# Altium PCB nixie-clock.pcbdoc
Units mil, origin at the board's own origin, x right, y up, seen from the top; angles counter-clockwise.
Board outline 3899.99 x 3080 mil, 2 copper layers (Top Layer, Bottom Layer); 35 components, 72 nets, 221 pads, 0 vias.
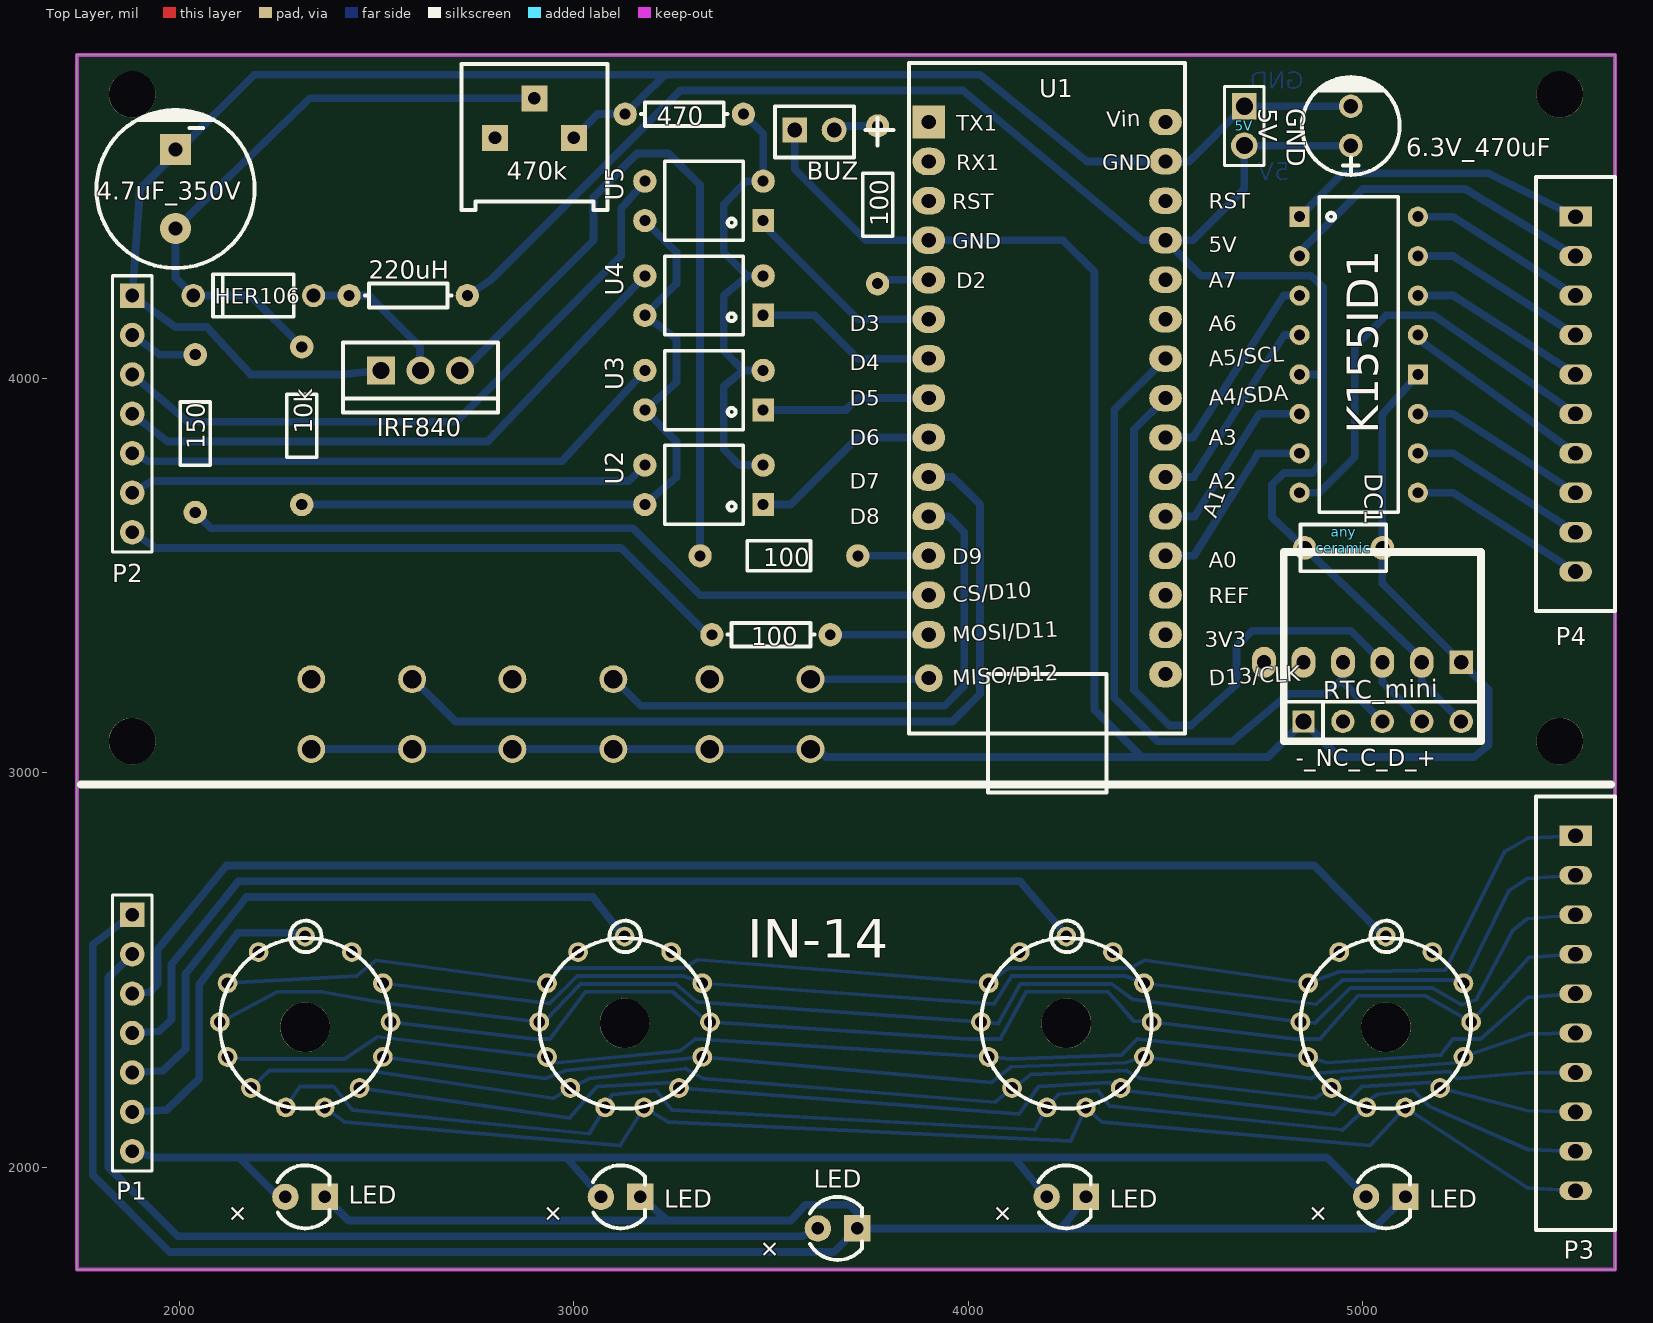
[diagram p0: Top Layer view]
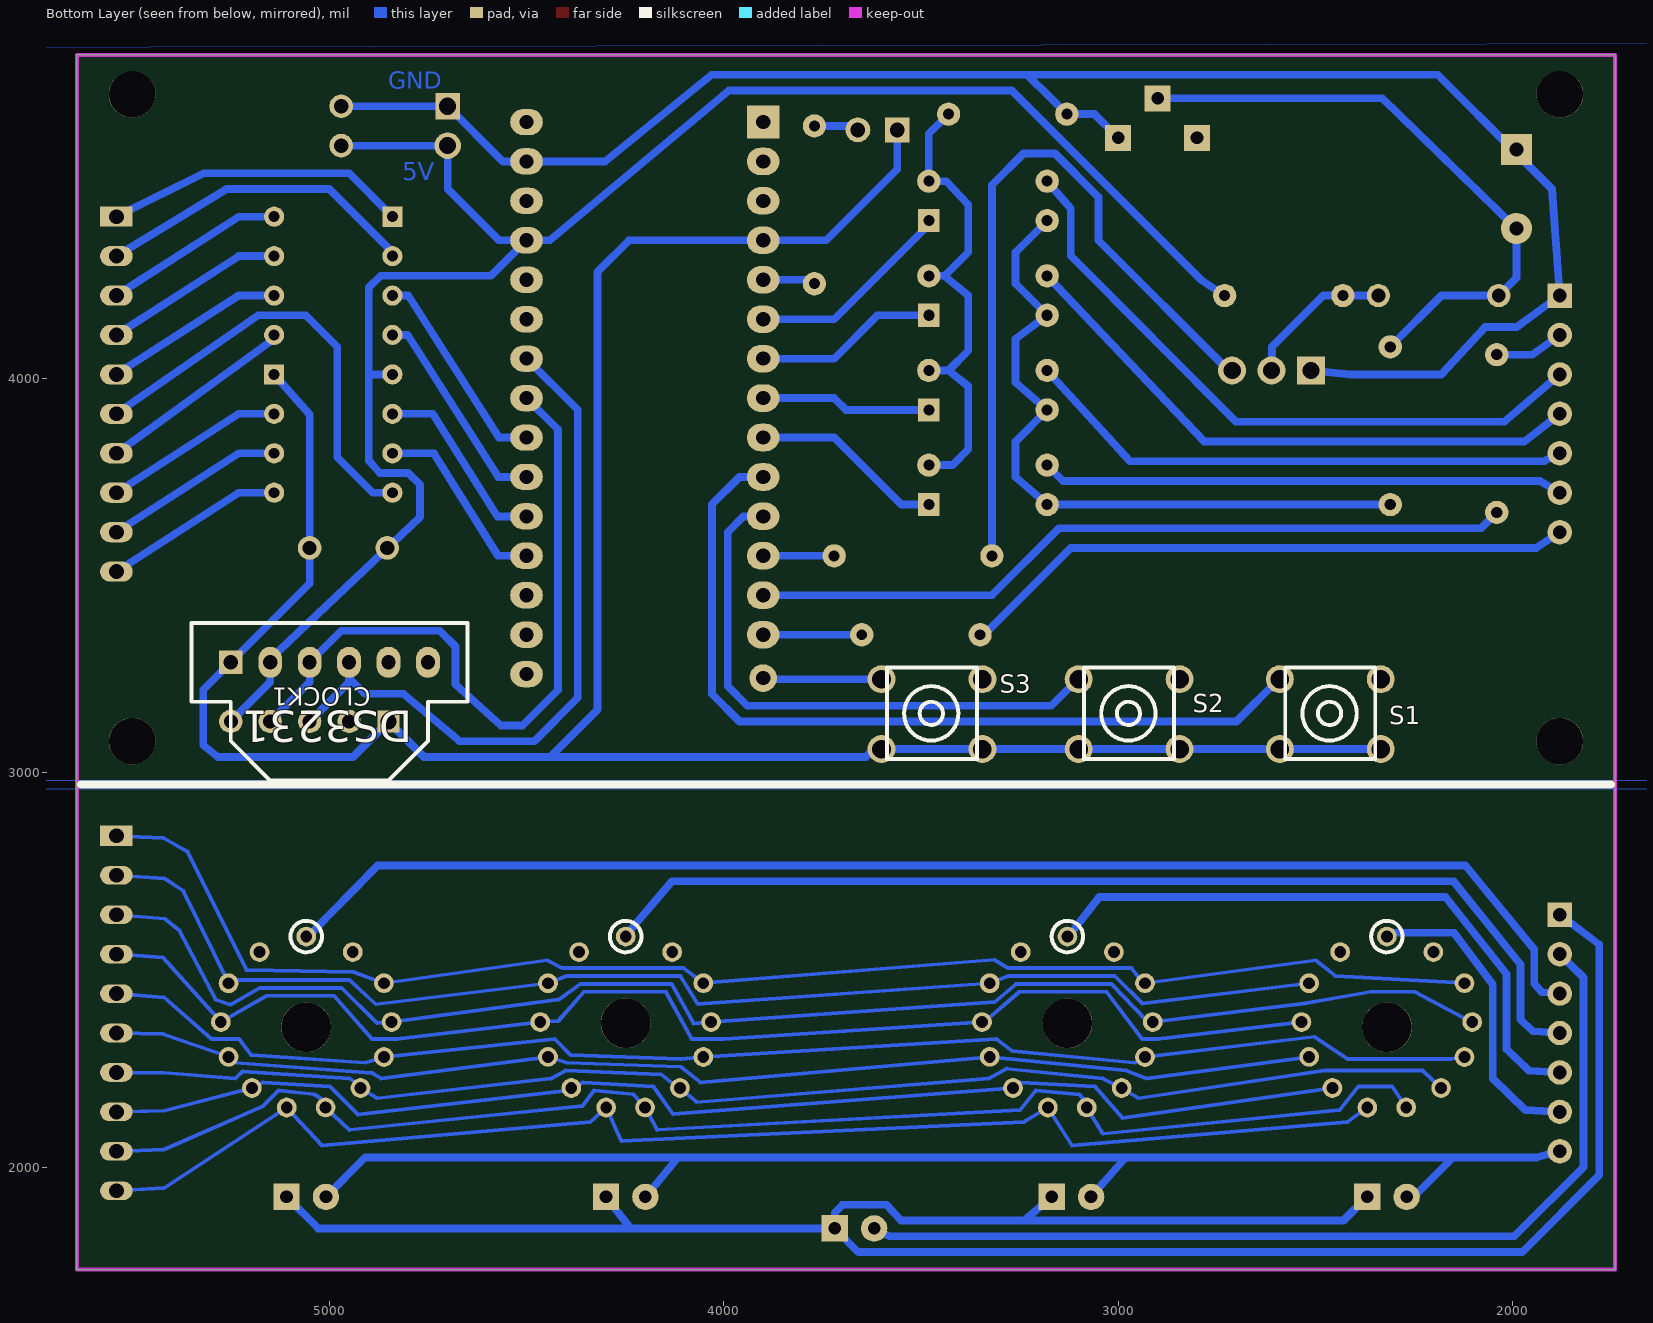
[diagram p1: Bottom Layer view, seen from below]

## Layer stack, top to bottom
Top Solder: solder mask 0.4, Solder Resist, Dk 3.5
Top Layer: signal copper 1.4
Dielectric1: dielectric 12.6, FR-4, Dk 4.8
Bottom Layer: signal copper 1.4
Bottom Solder: solder mask 0.4, Solder Resist, Dk 3.5

## Board outline
1740,1740 5639.99,1740 5639.99,4820 1740,4820

## Design rules (kind name [scope] priority, off if disabled: settings)
Clearance [All] p1: gap=10 ignorepadtopadclearanceinfootprint=FALSE
PolygonConnect [All] p1: connectstyle=Relief reliefconductorwidth=10 reliefentries=4 polygonreliefangle="90 Angle" airgapwidth=10
RoutingVias [All] p1: holewidth=28 width=50 viastyle="Through Hole" minholewidth=28 minwidth=50 maxholewidth=28 maxwidth=50
SolderMaskExpansion [All] p1: expansion=4 istentingtop=FALSE
Width [All] p1: maxlimit=10 minlimit=10 preferedwidth=10
30 further rules are at their usual default settings.

## Components (designator, comment, footprint, x,y, rotation, side; value= is the part's Value field where it differs from the comment)
4.7uF_350V "4.7u 350В" CP_10X13MM 1990,4479.99 r0 top
5V "HDR-2X1/2.54" HDR-2X1/2.54 4699.99,4639.99 r0 top
6.3V_470uF "CAP-D6.3XF2.5" CAP-D6.3XF2.5 4969.99,4639.99 r90 top
10k "10k" RC06 2310,3679.99 r90 top
100 "22k" RC06 3720,3549.99 r180 top
100 "330k" RC06 3770.01,4639.98 r270 top
100 "AXIAL-0.3" AXIAL-0.3 3500,3349.99 r0 top
150 "150" RC06 2040,3659.99 r90 top
220uH "AXIAL-0.3" AXIAL-0.3 2579.99,4209.99 r0 top
470 "AXIAL-0.3" AXIAL-0.3 3280,4669.99 r0 top
470k "_" 3386K 2900,4609.99 r0 top
"any / ceramic" "CAP-HV-5.0*3.0" CAP-HV-5.0*3.0 4949.99,3570 r180 top (schematic designator any)
BUZ "Buzzer" 2PIN_mod 3410,4629.99 r180 top
CLOCK1 "DS3231" DS3231 4949.99,3280 r180 bottom
DС1 "К155ИД1" DIP16_mod 4840,4409.99 r270 top
HER106 "HER106" DO-41 2339.99,4209.99 r180 top
IRF840 "IRF840" TO-220_mod 2619.99,4009.99 r180 top
LED "LED" LED3MM 3668.61,1844.58 r0 top
LED "LED" LED3MM 2318.62,1924.57 r0 top
LED "LED" LED3MM 3118.61,1924.57 r0 top
LED "LED" LED3MM 4248.6,1924.58 r0 top
LED "LED" LED3MM 5058.61,1924.57 r0 top
P1 "HDR-7X1/2.54" HDR-7X1/2.54 1880,2340 r0 top
P2 "HDR-7X1/2.54" HDR-7X1/2.54 1880,3909.99 r0 top
P3 "10PIN" B10B_mod#1 5539.99,2440 r90 top
P4 "10PIN" B10B_mod#2 5539.99,4009.99 r90 top
RTC_mini "HEADER_PRG_1X05" HEADER_PRG_1X05 5050,3129.99 r0 top
S1 "KEY-6.0*6.0-2" KEY-6.0*6.0-2 2459.99,3150 r0 bottom
S2 "KEY-6.0*6.0-2" KEY-6.0*6.0-2 2969.99,3150 r0 bottom
S3 "KEY-6.0*6.0-2" KEY-6.0*6.0-2 3469.99,3150 r0 bottom
U1 "ARDUINO-NANO-V3.0" "ARDUINO_NANO V3" 4200,3949.99 r0 top
U2 "TLP627" DIP4_mod 3480,3679.99 r90 top
U3 "TLP627" DIP4_mod 3479.99,3919.99 r90 top
U4 "TLP627" DIP4_mod 3479.99,4159.99 r90 top
U5 "TLP627" DIP4_mod 3479.99,4399.99 r90 top

## Footprints (in the part's own frame and the unit in brackets; to place one, negate y for a bottom-side part, rotate by r counter-clockwise, add the part's x,y. Pads: shape width x height; smd on the part's side, far side on the other; paste and mask are expansions set on the pad)
2PIN_mod [mm]
  round 1.6 hole 0.95 paste-2539.97 mask+0.102: 1(-6.35,0)
  rect 1.6x1.6 hole 0.95 paste-2539.97 mask+0.102: 2(-3.81,0)
  silkscreen extent -10.16,-1.52 -2.54,1.78
3386K [mil]
  rect 66x66 hole 32 paste-99999 mask+4: 1(-100.01,0.01) 2(-0.01,100.01) 3(99.99,0.01)
  silkscreen extent -185,-183 185,187
"ARDUINO_NANO V3" [mil]
  rect 82.68x82.68 hole 36 paste-99999 mask+4: 1(-300.01,700.01)
  oval 82.68x70 hole 36 paste-99999 mask+4: 2(-299.99,600) 3(-299.99,500) 4(-299.99,400) 5(-299.99,300) 6(-299.99,200) 7(-299.99,100) 8(-299.99,0) 9(-299.99,-100) 10(-299.99,-200) 11(-299.99,-300) 12(-299.99,-400) 13(-299.99,-500) 14(-299.99,-600)
  round 70 hole 36 paste-99999 mask+4: 15(-299.99,-710)
  oval 82.68x66.93 hole 36 paste-99999 mask+4: 16(300.01,-700) 17(300.01,-600) 18(300.01,-500) 19(300.01,-400) 20(300.01,-300) 21(300.01,-200) 22(300.01,-100) 23(300.01,0) 24(300.01,100) 25(300.01,200) 26(300.01,300) 27(300.01,400) 28(300.01,500) 29(300.01,600) 30(300.01,700)
  silkscreen extent -350,-1000 350,850
AXIAL-0.3 [mm]
  round 1.5 hole 0.7 paste-2539.97 mask+0.102: 1(-3.81,0) 2(3.81,0)
  silkscreen extent -2.79,-0.76 2.79,0.76
B10B_mod#1 [mm]
  rect 1.3x2.1 hole 0.95 paste-2539.97 mask+0.102: 1(10.16,0)
  oval 1.2x2.1 hole 0.95 paste-2539.97 mask+0.102: 2(7.62,0) 3(5.08,0) 4(2.54,0) 5(0,0) 6(-2.54,0) 7(-5.08,0) 8(-7.62,0) 9(-10.16,0) 10(-12.7,0)
  silkscreen extent -15.24,-2.54 12.7,2.54
B10B_mod#2 [mm]
  rect 1.3x2.1 hole 0.95 paste-2539.97 mask+0.102: 1(10.16,0)
  oval 1.3x2.1 hole 0.95 paste-2539.97 mask+0.102: 2(7.62,0) 3(5.08,0) 4(2.54,0) 5(0,0) 6(-2.54,0) 7(-5.08,0) 8(-7.62,0) 9(-10.16,0) 10(-12.7,0)
  silkscreen extent -15.24,-2.54 12.7,2.54
CAP-D6.3XF2.5 [mil]
  round 60 hole 36 paste-99999 mask+4: 1(-50,0) 2(50,0)
  silkscreen extent -124,-124 125,124
CAP-HV-5.0*3.0 [mil]
  round 60 hole 36 paste-99999 mask+4: 1(-100,0) 2(96.8,0)
  silkscreen extent -110,-59 107,59
CP_10X13MM [mm]
  round 2 hole 0.9 paste-2539.97 mask+0.102: 1(0,-2.54)
  rect 2x2 hole 0.9 paste-2539.97 mask+0.102: 2(0,2.54)
  silkscreen extent -5.1,-5.09 5.1,5.09
DIP4_mod [mm]
  rect 1.5x1.397 hole 0.711 paste-2539.97 mask+0.102: 1(0,0)
  round 1.5 hole 0.711 paste-2539.97 mask+0.102: 2(2.54,0) 3(2.54,7.62) 4(0,7.62)
  silkscreen extent -1.27,1.27 3.81,6.35
DIP16_mod [mm]
  rect 1.3x1.3 hole 0.701 paste-2539.97 mask+0.102: 1(0,0) 12(10.16,7.62)
  round 1.3 hole 0.701 paste-2539.97 mask+0.102: 2(2.54,0) 3(5.08,0) 4(7.62,0) 5(10.16,0) 6(12.7,0) 7(15.24,0) 8(17.78,0) 9(17.78,7.62) 10(15.24,7.62) 11(12.7,7.62) 13(7.62,7.62) 14(5.08,7.62) 15(2.54,7.62) 16(0,7.62)
  silkscreen extent -1.27,1.27 19.05,6.35
DO-41 [mm]
  round 1.5 hole 0.889 paste-2539.97 mask+0.102: 1(0,0) 2(7.747,0)
  silkscreen extent 1.27,-1.37 6.48,1.37
DS3231 [mm]
  rect 1.52x1.52 hole 0.914 paste-2539.97 mask+0.102: 1(-7.62,0)
  oval 1.524x2 hole 0.914 paste-2539.97 mask+0.102: 2(-5.08,0) 3(-2.54,0)
  oval 1.54x2 hole 0.914 paste-2539.97 mask+0.102: 4(0,0) 5(2.54,0) 6(5.08,0)
  silkscreen extent -10.16,-7.62 7.62,2.54
HDR-2X1/2.54 [mm]
  rect 1.575x1.7 hole 1.1 paste-2539.97 mask+0.102: 1(0,1.27)
  round 1.7 hole 1.1 paste-2539.97 mask+0.102: 2(0,-1.27)
  silkscreen extent -1.27,-2.54 1.27,2.54
HDR-7X1/2.54 [mil]
  rect 62x62 hole 35 paste-99999 mask+4: 1(-0.01,300)
  round 62 hole 35 paste-99999 mask+4: 2(-0.01,200) 3(-0.01,100) 4(-0.01,0) 5(-0.01,-100) 6(-0.01,-200) 7(-0.01,-300)
  silkscreen extent -50,-350 50,350
HEADER_PRG_1X05 [mm]
  rect 1.415x1.415 hole 1.016 paste-2539.97 mask+0.102: 1(-5.08,0)
  round 1.5 hole 0.9 paste-2539.97 mask+0.102: 2(-2.54,0) 3(0,0) 4(2.54,0) 5(5.08,0)
  silkscreen extent -6.35,-1.27 6.35,1.27
KEY-6.0*6.0-2 [mm]
  round 1.8 hole 1.2 paste-2539.97 mask+0.102: 1(-3.198,2.286) 2(3.302,2.286) 3(-3.198,-2.214) 4(3.302,-2.214)
  silkscreen extent -2.85,-2.96 2.95,2.93
LED3MM [mm]
  round 1.7 hole 0.813 paste-2539.97 mask+0.102: A(-1.27,0)
  rect 1.7x1.7 hole 0.813 paste-2539.97 mask+0.102: K(1.27,0)
  silkscreen extent -1.79,-2.03 1.57,2.03
RC06 [mm]
  round 1.5 hole 0.711 paste-2539.97 mask+0.102: 1(0,0) 2(10.16,0)
  silkscreen extent 3.05,-0.96 7.11,0.97
TO-220_mod [mm]
  round 1.8 hole 1.118 paste-2539.97 mask+0.102: 1(-2.312,-0.254) 2(0.229,-0.254)
  rect 1.8x1.8 hole 1.118 paste-2539.97 mask+0.102: 3(2.768,-0.254)
  silkscreen extent -4.78,-2.05 5.22,2.45

## Free pads (board coordinates)
  round 50 hole 30 paste-99999 mask+4: 1(2318.61,2584.57) 1(3128.61,2584.58) 1(4248.6,2584.58) 1(5058.6,2584.58) 2(2269.51,2151.37) 2(3079.51,2151.38) 2(4199.5,2151.38) 2(5009.5,2151.38) 3(2102.21,2367.87) 3(2912.21,2367.88) 3(4032.2,2367.88) 3(4842.2,2367.88) 4(2535.21,2367.87) 4(3345.21,2367.88) 4(4465.2,2367.88) 4(5275.2,2367.88) 5(2515.61,2466.17) 5(3325.61,2466.18) 5(4445.6,2466.18) 5(5255.6,2466.18) 6(2436.91,2545.17) 6(3246.91,2545.18) 6(4366.9,2545.18) 6(5176.9,2545.18) 7(2121.81,2466.37) 7(2931.81,2466.38) 7(4051.8,2466.38) 7(4861.8,2466.38) 8(2200.71,2545.17) 8(3010.71,2545.18) 8(4130.7,2545.18) 8(4940.7,2545.18) 9(2121.81,2279.17) 9(2931.81,2279.18) 9(4051.8,2279.18) 9(4861.8,2279.18) 10(2181.01,2200.57) 10(2991.01,2200.58) 10(4111,2200.58) 10(4921,2200.58) 11(2368.11,2151.17) 11(3178.11,2151.18) 11(4298.1,2151.18) 11(5108.1,2151.18) 12(2456.51,2200.57) 12(3266.51,2200.58) 12(4386.5,2200.58) 12(5196.5,2200.58) 13(2515.61,2279.57) 13(3325.61,2279.58) 13(4445.6,2279.58) 13(5255.6,2279.58)
  round 118.11 hole 118.11 unplated paste-99999: ""(1880,3080) ""(1880,4720) ""(5499.99,3080) ""(5499.99,4720)
  round 125.98 hole 125.98 unplated paste-99999: ""(2318.6,2354.58) ""(3128.6,2364.58) ""(4248.6,2364.58) ""(5058.61,2354.58)

## Nets (pads, with @x,y where several pads share a name; then routed paths per layer and width w, separated by ;. In a path a pad name is that pad's centre, name@x,y a point inside that pad or via, vN(x,y) a via of type N, cw(c..) or ccw(c..) an arc to the next point about the centre after c; other vN are vias at no path point)
$BOARDOUTLINENET: 
+5V: 5V.2 6.3V_470uF.1 220uH.2 "any / ceramic.2" CLOCK1.2 DС1.5 RTC_mini.5 U1.27 | length 4720.9
  Bottom Layer w19.68: 220uH.2 2789.99,4250 3269.99,4730 3986.99,4730 4441.99,4350 U1.27 ; 6.3V_470uF.1 5V.2 4699.99,4479.99 4569.98,4349.99 U1.27 ; RTC_mini.5 5149.98,3230.01 CLOCK1.2 5149.98,3288.54 4769.99,3648.27 4769.99,3730 4799.99,3760 4872.15,3760 4899.99,3791.21 4899.99,4009.99 DС1.5 4899.99,4011.42 4899.99,4230.33 4869.3,4260 4589.99,4260 U1.27
B0: DС1.7 U1.19 | length 484.1
  Bottom Layer w19.68: U1.19 4572.46,3550.01 4734.99,3810 DС1.7
B1: DС1.6 U1.20 | length 483.5
  Bottom Layer w19.68: U1.20 4573.95,3650 4737.8,3910 DС1.6
B2: DС1.4 U1.21 | length 537.2
  Bottom Layer w19.68: U1.21 4571.66,3750 4801.66,4110 DС1.4
B3: DС1.3 U1.22 | length 537.2
  Bottom Layer w19.68: U1.22 4569.99,3849.99 4799.99,4209.99 DС1.3
BUTT1: S1.4 U1.10 | length 2149.5
  Bottom Layer w19.68: S1.4@2592.89,3237.1 2699.99,3130 3959.99,3130 4029.99,3200 4029.99,3680 3959.99,3750 U1.10
BUTT2: S2.4 U1.11 | length 1432.3
  Bottom Layer w19.68: S2.4@3102.79,3237.2 3169.99,3170 3939.99,3170 3989.99,3220 3989.99,3610 3949.99,3650 U1.11
BUTT3: S3.4 U1.15 | length 301.2
  Bottom Layer w19.68: S3.4 3897.19,3237.2 U1.15
BUZZERPIN: 100.1@3770.01,4639.98 BUZ.1 | length 114.1
  Bottom Layer w19.68: BUZ.1 3669.98,4639.98 100.1@3770.01,4639.98
DISP2_3: P3.10 pad.11@2368.11,2151.17 pad.11@4298.1,2151.18 | length 3539.7
  Bottom Layer w9.84: pad.11@2368.11,2151.17 2418.6,2114.58 3116.97,2054.58 ; P3.10 5419.08,1947.16 5108.09,2151.18 5018.6,2054.58 4338.6,2114.58 4298.1,2151.18 4259.6,2066.58 3238.6,2114.58 3178.11,2151.18 ; 3116.97,2054.58 3178.11,2151.18 ; 3116.97,2054.58 3178.11,2151.18
DISP2_4: P3.9 pad.2@5009.5,2151.38 | length 590.6
  Bottom Layer w9.84: pad.2@5009.5,2151.38 5009.5,2165.48 5038.6,2184.58 5128.6,2194.58 5168.6,2154.58 5419.6,2044.56 P3.9
DISP2_5: P3.8 pad.12@5196.5,2200.58 | length 350.9
  Bottom Layer w9.84: pad.12@5196.5,2200.58 5418.31,2143.03 P3.8
DISP2_9: P3.4 pad.4@5275.2,2367.88 | length 338
  Bottom Layer w9.84: pad.4@5275.2,2367.88 5422.36,2531.52 P3.4
DISP2_10: P3.3 pad.3@4842.2,2367.88 | length 865.5
  Bottom Layer w9.84: pad.3@4842.19,2367.88 4879.26,2365.24 4968.6,2454.58 5176.1,2454.58 5250.69,2411.95 5288.6,2424.58 5379.99,2600 5417.02,2629.63 P3.3
DISP2_11: P3.2 pad.5@5255.6,2466.18 | length 440.3
  Bottom Layer w9.84: pad.5@5255.59,2466.18 5369.99,2700 5418.3,2732.2 P3.2
GND: 4.7uF_350V.2 5V.1 6.3V_470uF.2 470.1 470k.3 "any / ceramic.1" BUZ.2 CLOCK1.1 DС1.12 IRF840.3 P2.1 RTC_mini.1 S1.1 S1.2 S2.1 S2.2 S3.1 S3.2 U1.4 U1.29 | length 10986.9
  Bottom Layer w19.68: S1.1@2364.09,3060 3619.99,3060 3639.99,3040 4439.99,3040 ; IRF840.3 2410.97,4010 2180,4010 2070,4129.99 1990,4129.99 P2.1 1899.99,4480.02 1989.98,4570.01 2189.99,4769.99 4029.99,4770 4300.99,4550 U1.29 4559.99,4550 5V.1 6.3V_470uF.2 ; 470k.3 3059.98,4669.99 470.1 3170.94,4710.93 3230.99,4770 ; BUZ.2 3559.99,4530 3740,4349.99 U1.4 4239.99,4350 4319.99,4270 4319.99,3160 4439.99,3040 ; DС1.12 5049.99,3908.75 5049.99,3480 CLOCK1.1 5319.99,3210 5319.99,3070 5282.49,3040 4939.99,3040 RTC_mini.1 4759.99,3040 4439.99,3040
GND2: LED.K P1.1 | length 5938.6
  Bottom Layer w19.68: P1.1 1780,2564.21 1780,1980 1975.43,1784.57 3658.61,1784.57 LED.K@3718.61,1844.57 ; LED.K@2368.61,1924.57 2428.61,1864.57 3550.16,1864.57 3587.04,1904.57 3698.6,1904.57 3718.6,1884.57 LED.K@3718.6,1844.57 ; LED.K@3168.61,1924.56 3238.27,1864.57 ; 4108.6,1844.57 5028.62,1844.57 LED.K@5108.61,1924.56 ; LED.K@4298.6,1924.57 4235.6,1844.57 LED.K@3718.6,1844.57
JP2_1: P2.6 U2.3 | length 1324.9
  Bottom Layer w19.68: P2.6 1930,3740 3139.99,3740 U2.3
JP2_2: P2.5 U3.3 | length 1406.2
  Bottom Layer w19.68: P2.5 1920,3789.99 2969.99,3789.99 U3.3
JP2_3: P2.4 U4.3 | length 1504.7
  Bottom Layer w19.68: P2.4 1970,3840 2782.07,3840 U4.3
JP2_4: P2.3 U5.3 | length 1670.6
  Bottom Layer w19.68: P2.3 2020,3890 2701.29,3890 3119.99,4310.97 3119.99,4430 U5.3
JP2_5: 150.2 P2.2 | length 176
  Bottom Layer w19.68: P2.2 1950,4060 150.2
JP7_1: P1.6 | length 779.3
  Bottom Layer w19.68: P1.6 1967.2,2144.58 2050,2224.56 2050,2463.16 2148.99,2594.55 2308.51,2594.67 2318.6,2584.58
JP7_2: P1.5 | length 1601.2
  Bottom Layer w19.68: P1.5 1958.17,2244.59 2015,2299.04 2015,2489.84 2170.13,2684.58 3047.63,2684.58 3125.71,2584.57
JP7_3: P1.4 | length 2679.4
  Bottom Layer w19.68: P1.4 1948.08,2344.58 1979.98,2374.89 1980,2514.32 2148.95,2724.58 4131.42,2724.58 4245.6,2591.27
JP7_4: P1.3 pad.1@5058.6,2584.58 | length 3447.4
  Bottom Layer w19.68: P1.3 1925.51,2443.48 1945,2465.7 1945,2551.68 2119.27,2764.58 4877.79,2764.58 pad.1@5054.9,2584.58
JP7_5: LED.A@3618.62,1844.57 P1.2 | length 2441.1
  Bottom Layer w19.68: P1.2 1820,2480.81 1820,2000 1995.43,1824.57 3578.61,1824.57 LED.A@3618.61,1844.57
KEYB_PIN: U1.25
PEREM: P3.7 pad.10@4921,2200.58 | length 639.2
  Bottom Layer w9.84: pad.10@4920.99,2200.58 4920.99,2206.98 4948.6,2224.58 5220.45,2242.73 5238.6,2224.58 5419.59,2239.16 P3.7
POWER: U1.30
PWMPIN: 100.1@3720,3549.99 U1.12 | length 180
  Bottom Layer w19.68: 100.1@3720,3549.99 U1.12
Q1_2: 220uH.1 HER106.1 IRF840.2 | length 383.9
  Bottom Layer w19.68: HER106.1 2479.99,4209.99 2609.99,4080.01 IRF840.2
R1_2: 100.2@3320,3549.99 IRF840.1 | length 1874.4
  Bottom Layer w19.68: IRF840.1 2719.99,4020 3049.99,4350 3049.99,4460 3159.99,4570 3239.99,4570 3320,4489.99 100.2@3320,3549.99
R4_1: 150.1 U1.13 | length 1947
  Bottom Layer w19.68: 150.1 2079.99,3620 3149.99,3620 3319.99,3450 U1.13
RBUZ: 100.2@3770.01,4239.98 U1.5 | length 134.1
  Bottom Layer w19.68: 100.2@3770.01,4239.98 3780.02,4249.99 U1.5
S$524: 4.7uF_350V.1 10k.2 470k.2 HER106.2 | length 1551.3
  Bottom Layer w19.68: 4.7uF_350V.1@1989.99,4370 1989.99,4254.99 HER106.2 2180,4209.99 10k.2 ; 4.7uF_350V.1 2329.99,4710 470k.2
S$3305: LED.A@2268.62,1924.57 LED.A@3068.62,1924.57 LED.A@4198.61,1924.57 LED.A@5008.62,1924.57 P1.7 | length 3594.7
  Bottom Layer w19.68: P1.7 1938.6,2024.58 4908.6,2024.58 LED.A@5008.61,1924.56 ; 2150.6,2024.57 2250.61,1924.56 LED.A@2268.61,1924.56 ; 2980.6,2024.57 LED.A@3068.61,1924.56 ; 4115.6,2024.57 LED.A@4198.6,1924.57
S$3415: 100.1@3350,3349.99 P2.7 | length 1573.2
  Bottom Layer w19.68: P2.7 1940,3570 3119.99,3570 3340,3349.99 100.1@3350,3349.99
S$3417: 100.2@3650,3349.99 U1.14 | length 250
  Bottom Layer w19.68: 100.2@3650,3349.99 U1.14
S$5612: U1.16
S$19127: pad.11@3178.11,2151.18 pad.11@5108.1,2151.18 | length 93
  Bottom Layer w9.84: 4259.6,2066.58 4298.1,2151.18
S$19168: pad.2@2269.51,2151.37 pad.2@3079.51,2151.38 | length 2978.6
  Bottom Layer w9.84: pad.2@2269.51,2151.38 2305.34,2204.58 2390.6,2204.58 2438.6,2144.58 3038.6,2084.58 pad.2@3079.51,2151.38 ; pad.2@3073.6,2156.38 3098.6,2184.58 3208.6,2194.58 3248.6,2144.58 4168.6,2094.58 4199.5,2151.38 4201.17,2150.23 4228.6,2184.58 4328.6,2194.58 4358.6,2154.58 4948.6,2094.58 5009.5,2151.38
S$19174: pad.12@2456.51,2200.57 pad.12@3266.51,2200.58 | length 2868.2
  Bottom Layer w9.84: pad.12@2456.51,2200.57 2988.6,2124.58 3058.6,2204.58 3248.6,2214.58 3266.51,2200.58 4128.6,2134.58 4178.6,2204.58 4356.43,2214.58 4386.5,2200.58 ; 4383.6,2195.57 4927.58,2133.56 4998.6,2204.58 5168.6,2214.58 5196.5,2200.58
S$19218: pad.10@2181.01,2200.57 pad.10@2991.01,2200.58 | length 2830.2
  Bottom Layer w9.84: pad.10@2181.01,2200.57 2227.94,2244.58 2477.15,2244.58 2948.6,2174.58 2991.01,2200.58 3038.6,2224.58 3283.07,2249.56 3328.6,2224.58 4068.6,2164.58 4111,2200.58 ; 4108.6,2195.58 4158.6,2234.58 4401.51,2244.58 4438.6,2224.58 4878.6,2174.58 4921,2200.58
S$19328: P3.6 pad.13 | length 3086
  Bottom Layer w9.84: pad.13@2515.61,2279.58 2928.6,2224.58 2978.6,2244.58 3325.61,2279.58 4058.6,2214.58 4108.6,2254.58 4398.6,2264.58 4445.6,2279.58 4868.6,2224.58 4892.53,2238.94 5256.61,2265.95 5255.6,2279.58 5421.58,2337.09 P3.6
S$19332: P3.5 pad.9 | length 3537.4
  Bottom Layer w9.84: pad.9@2121.81,2279.18 2155.46,2274.58 2418.61,2274.58 2502.52,2330.53 2931.81,2279.18 2958.6,2264.58 3268.6,2294.58 3308.6,2324.58 4051.8,2279.18 4108.6,2274.58 4388.6,2284.58 4428.6,2324.58 4861.8,2279.18 4908.6,2264.58 5198.6,2284.58 5228.6,2324.58 5298.59,2324.58 5418.66,2430.05 P3.5
S$19336: pad.4@2535.21,2367.87 pad.4@3345.21,2367.88 | length 3006.6
  Bottom Layer w9.84: pad.4@2535.21,2367.87 2898.6,2324.58 2938.6,2324.58 3029.57,2444.58 3250.27,2444.58 3339.32,2368.25 3345.21,2367.88 3998.6,2324.58 4081.33,2324.58 4146.78,2444.58 4354.47,2444.58 4419.64,2370.74 4465.2,2367.88 4828.6,2324.58 4891.93,2324.58 4988.6,2434.58 5158.6,2434.58 5275.2,2367.88
S$19343: pad.3@2102.21,2367.87 pad.3@2912.21,2367.88 pad.3@4032.2,2367.88 | length 2898.9
  Bottom Layer w9.84: pad.3@2102.21,2367.87 2248.6,2444.58 2358.6,2444.58 2528.6,2414.58 2912.21,2367.88 2927.59,2371.78 3016.52,2464.58 3258.6,2464.58 3313.23,2418.61 4032.2,2367.88 4076.23,2364.32 4131.94,2464.58 4363.66,2464.58 4418.6,2424.58 4842.2,2367.88
S$19348: pad.5@2515.61,2466.17 pad.5@3325.61,2466.18 | length 2850.3
  Bottom Layer w9.84: pad.5@2515.61,2466.17 2938.6,2414.58 3008.6,2484.58 3278.6,2484.58 3325.61,2466.18 4065.47,2413.58 4109.85,2484.58 4398.6,2484.58 4445.6,2466.18 4882.13,2412.94 4948.6,2474.58 5243.27,2474.58 5255.6,2466.18
S$19354: P3.1 pad.7 | length 3687.4
  Bottom Layer w9.84: pad.7@2121.81,2466.37 2448.6,2484.58 2498.6,2524.58 2931.81,2466.38 2936.39,2466.26 2966.44,2504.58 3278.6,2504.58 3313.91,2525.76 4051.8,2466.38 4050.43,2466.41 4102.15,2504.58 4408.6,2504.58 4448.6,2524.58 4861.8,2466.38 4938.6,2494.58 5209.99,2500 5359.99,2800 5420.41,2834.52 P3.1
S$24934: 
S$24942: 
S$25850: 
U1_7: U1.6 U5.1 | length 543.6
  Bottom Layer w19.68: U5.1 3469.99,4400 3719.99,4149.99 U1.6
U1_10: U1.8 U3.1 | length 432.4
  Bottom Layer w19.68: U3.1 3689.97,3919.98 3719.98,3949.99 U1.8
U1_11: U1.9 U2.1 | length 490.4
  Bottom Layer w19.68: U2.1 3549.96,3679.97 3719.98,3849.99 U1.9
U1_23: CLOCK1.3 RTC_mini.4 U1.23 | length 1817.4
  Bottom Layer w19.68: U1.23 4419.99,3870 4419.99,3210 4509.99,3120 4564.64,3120 4679.99,3224.2 4679.99,3320 4719.99,3360 4969.99,3360 CLOCK1.3 5049.98,3230.01 RTC_mini.4
U1_24: CLOCK1.4 RTC_mini.3 U1.24 | length 1831.3
  Bottom Layer w19.68: U1.24 4369.99,3920 4369.99,3190 4479.99,3080 4669.7,3080 4811.83,3200 4909.99,3200 4949.99,3240 CLOCK1.4 4949.98,3230.01 RTC_mini.3
U4_1: U1.7 U4.1 | length 465.6
  Bottom Layer w19.68: U4.1 3609.99,4160 3720,4049.99 U1.7
U4_4: 10k.1 U2.4 U3.4 U4.4 U5.4 | length 1802
  Bottom Layer w19.68: 10k.1 U2.4 3259.99,3749.99 3259.99,3839.99 U3.4 3259.99,3990 3259.99,4099.99 U4.4 3259.99,4240 3259.99,4319.99 U5.4
U5_2: 470.2 U2.2 U3.2 U4.2 U5.2 | length 1331.2
  Bottom Layer w19.68: 470.2 3479.99,4620 U5.2 3436.07,4500 3379.99,4440.59 3379.99,4319.99 3439.99,4260 ; U2.2 3419.99,3780 3379.99,3820 3379.99,3979.99 3429.99,4020 ; 3429.99,4020 U3.2 3429.99,4020 ; 3429.99,4020 3379.99,4069.99 3379.99,4209.99 3439.99,4260 ; 3439.99,4260 U4.2 3439.99,4260
"": DС1.1 P4.1 | length 771.5
  Bottom Layer w19.68: DС1.1 4949.99,4519.99 5319.99,4519.99 P4.1
"": DС1.2 P4.2 | length 823.8
  Bottom Layer w19.68: DС1.2 4840,4320.01 4999.99,4479.99 5259.99,4479.99 P4.2
"": DС1.8 P4.6 | length 1128.7
  Bottom Layer w19.68: DС1.8 4889.98,3709.99 4979.99,3800 4979.99,4080 5059.99,4160 5179.99,4160 P4.6
"": DС1.16 P4.3 | length 458.9
  Bottom Layer w19.68: DС1.16 5230,4409.99 P4.3
"": DС1.15 P4.4 | length 458.9
  Bottom Layer w19.68: DС1.15 5230,4309.99 P4.4
"": DС1.14 P4.5 | length 458.9
  Bottom Layer w19.68: DС1.14 5230,4209.99 P4.5
"": DС1.13 P4.7 | length 504.1
  Bottom Layer w19.68: DС1.13 5140,4099.99 P4.7
"": DС1.11 P4.8 | length 458.9
  Bottom Layer w19.68: DС1.11 5230,3909.99 P4.8
"": DС1.10 P4.9 | length 458.9
  Bottom Layer w19.68: DС1.10 5230,3809.99 P4.9
"": DС1.9 P4.10 | length 458.9
  Bottom Layer w19.68: DС1.9 5230,3709.99 P4.10
pads on no net: 470k.1 CLOCK1.5 CLOCK1.6 RTC_mini.2 S1.3 S2.3 S3.3 U1.1 U1.2 U1.3 U1.17 U1.18 U1.26 U1.28

## Polygon pours and split planes (outlines as drawn)
GND on Bottom Layer "Bottom Layer-GND" (solid, pour order 1): 1500,4849.99 1500,2980 6009.99,2980 6009.99,4839.99 6019.99,4839.99
GND2 on Bottom Layer "Bottom Layer-GND2" (solid, pour order 0): 1510,2960 1510,2950 1510,1500 1530,1520 6019.99,1520 6009.99,1530 6009.99,2960

## Other copper
Bottom Layer:
  text "GND" at 4850.62,4734.72 h43.31

## Silkscreen, mask and mechanical layers (free items; w line width, h text height)
Top Overlay:
  circle w10: c2318.61,2364.58 r216.5
  circle w10: c3128.61,2364.58 r216.5
  circle w10: c4248.6,2364.58 r216.5
  circle w10: c5058.6,2364.58 r216.5
  circle w10: c5059.99,2585 r40.01
  circle w10: c4249.99,2585 r40.01
  circle w10: c3129.99,2585 r40.01
  circle w10: c2319.99,2585 r40.01
  lines w19.68: 1750,2970 5629.99,2970 1750,2970 ; 4799.99,3080 4799.99,3560 5299.99,3560 5299.99,3080 4799.99,3080
  text "GND / 5V" at 4736.37,4684.25 h47.24 r270
  text "K155ID1" at 5039.99,3860 h80 r90
  text "-_NC_C_D_+" at 4829.99,3015.93 h42.13
  text "IN-14" at 3439.99,2530.78 h98.42
  text "+" at 2152.31,1917.67 h50 r225
  text "+" at 2952.31,1917.67 h50 r225
  text "+" at 4092.31,1917.67 h50 r225
  text "+" at 4892.31,1917.67 h50 r225
  text "+" at 3502.31,1827.67 h50 r225
Bottom Overlay:
  circle w10: c5058.62,2584.57 r40.01
  circle w10: c4248.61,2584.58 r40.01
  circle w10: c3128.6,2584.58 r40.01
  circle w10: c2318.61,2584.58 r40.01
  lines w19.68: 1749.99,2970 5629.99,2970

## Text inside footprints (layer, text, board x,y; h text height)
470k: Document "3" at 3015,4749.99 h30 r180; Document "1" at 2775,4544.99 h20 r180; Document "2" at 2825,4694.99 h20 r180; Document "3" at 3000,4544.99 h20 r180
U1: Top Overlay "TX1" at 3970,4628.19 h40; Top Overlay "GND" at 4340,4528.19 h40; Top Overlay "5V" at 4610,4319.99 h40; Top Overlay "MISO/D12" at 3961.04,3220.92 h40 r3; Top Overlay "Vin" at 4350.7,4636.4 h40 r2; Top Overlay "D13/CLK" at 4611.05,3220.01 h40 r3; Top Overlay "GND" at 3960,4328.19 h40; Top Overlay "RX1" at 3970,4528.19 h40; Top Overlay "RST" at 3960,4428.19 h40; Top Overlay "D2" at 3970,4228.19 h40; Top Overlay "D3" at 3700,4119.99 h40; Top Overlay "D4" at 3700,4019.99 h40; Top Overlay "D5" at 3700,3929.99 h40; Top Overlay "D6" at 3700,3829.99 h40; Top Overlay "D7" at 3700,3719.99 h40; Top Overlay "D8" at 3700,3629.99 h40; Top Overlay "D9" at 3960,3528.2 h40; Top Overlay "CS/D10" at 3961.39,3430.94 h40 r4; Top Overlay "MOSI/D11" at 3961.04,3330.92 h40 r3; Top Overlay "3V3" at 4600,3318.2 h40; Top Overlay "REF" at 4610,3429.99 h40; Top Overlay "A0" at 4610,3519.99 h40; Top Overlay "A1" at 4628.67,3642.82 h40 r69; Top Overlay "A2" at 4610,3719.99 h40; Top Overlay "A3" at 4610,3829.99 h40; Top Overlay "A4/SDA" at 4611.4,3930.03 h40 r4; Top Overlay "A5/SCL" at 4611.4,4030.03 h40 r4; Top Overlay "A6" at 4610,4119.99 h40; Top Overlay "A7" at 4610,4229.99 h40; Top Overlay "RST" at 4610,4429.99 h40